# Altium PCB bottle.PcbDoc (part 3 of 3)
Units mil, origin at the board's own origin, x right, y up, seen from the top; angles counter-clockwise.
Board outline 2167.23 x 704.79 mil, 4 copper layers (Top Layer, GND, PWR, Bottom Layer), stack 23.756 mil thick; 195 components, 172 nets, 770 pads, 122 vias.
Unrouted connection lines stored in the file: 308.
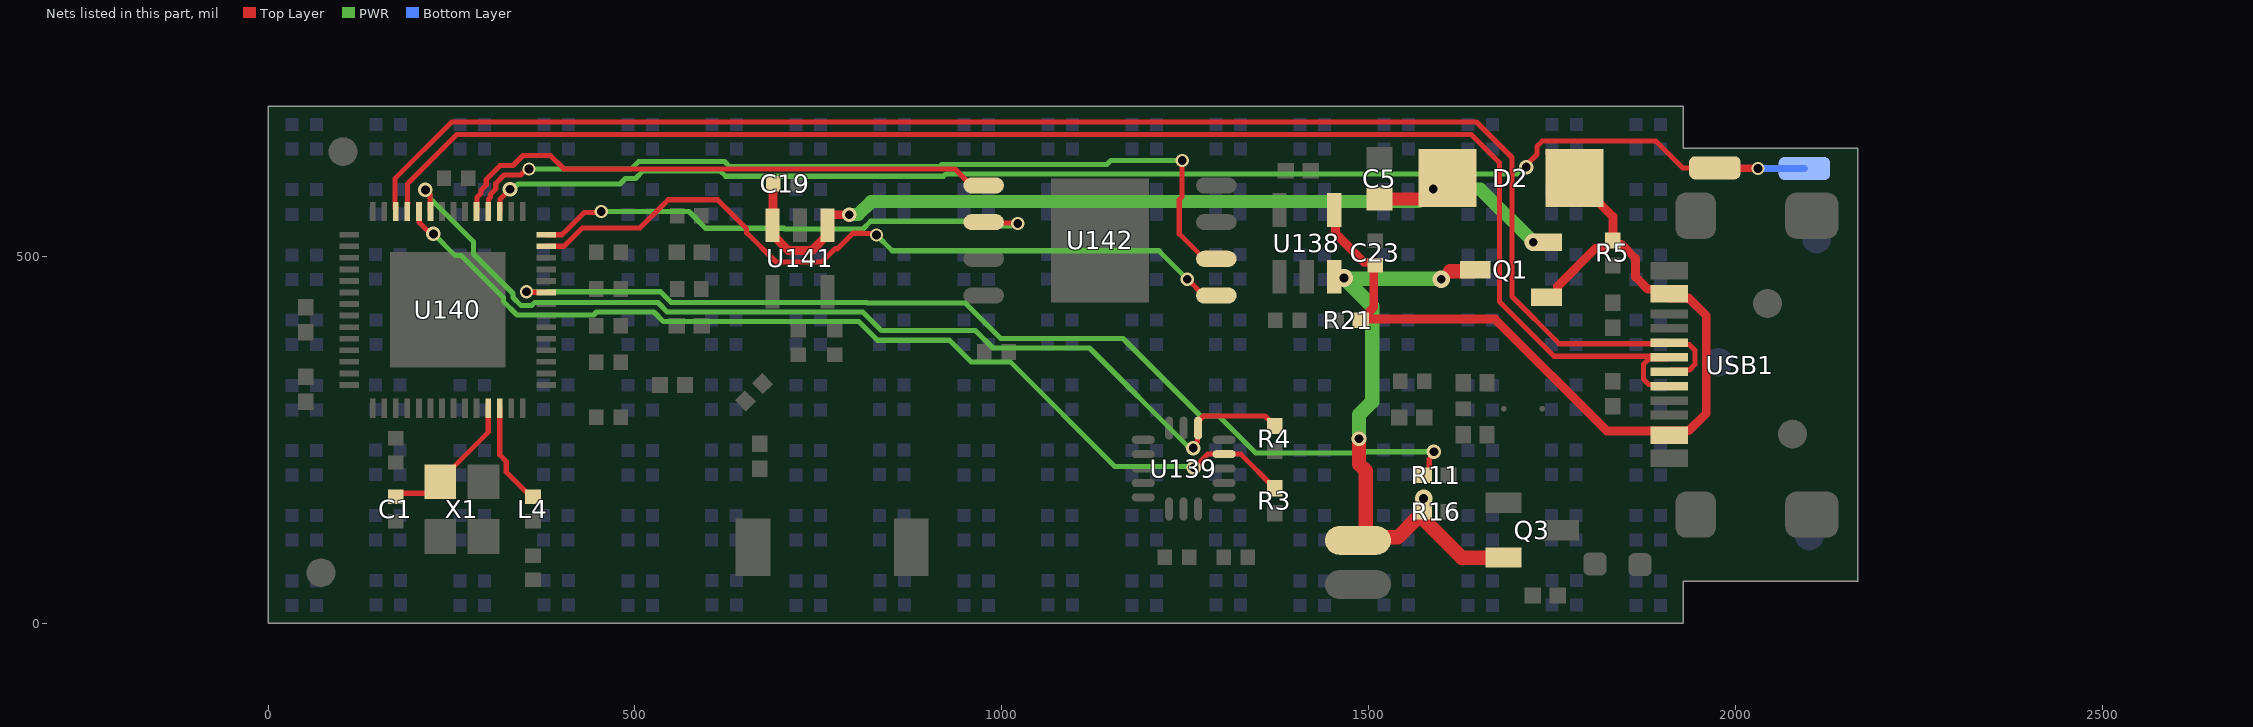
[diagram p5: the nets of this part, all layers, seen from the top]

## Via types
v1: diameter 20, hole 12, Top Layer to Bottom Layer, tented both sides, 96 vias
v2: diameter 18, hole 12, Top Layer to Bottom Layer, tented both sides, 13 vias
v3: diameter 24, hole 12, Top Layer to Bottom Layer, tented both sides, 13 vias

## Nets (pads, with @x,y where several pads share a name; then routed paths per layer and width w, separated by ;. In a path a pad name is that pad's centre, name@x,y a point inside that pad or via, vN(x,y) a via of type N, cw(c..) or ccw(c..) an arc to the next point about the centre after c; other vN are vias at no path point) (continued)
POWER_CONTROL: R11.2 U140.9 | length 1394.3
  Top Layer w7: v2(352.09,452.05) 352.65,451.49 378.53,451.49 U140.9@378.97,451.05 ; R11.2@1575.12,202 1575.63,202 1582.76,209.13 1582.76,224.04 1589.2,230.48 v1(1589.2,234)
  PWR w7: v2(352.09,452.05) 534.96,452.05 549.48,437.53 815.92,437.53 816.62,436.84 950.16,436.84 998.61,388.39 1165.28,388.39 1271.03,282.65 1295.86,282.65 1346.2,232.31 1495.09,232.31 1496.78,234 v1(1589.2,234)
SCL: R3.1 U139.4 U140.24 | length 1353.5
  Top Layer w7: U140.24@205.44,561.59 205.88,561.15 205.88,546.44 218.83,533.49 222.71,533.49 v1(225.2,531) ; v1(1262,212.1) 1280.6,230.7 U139.4@1303.1,230.7 1325.85,230.7 1372,184.55 R3.1@1372,184.04
  PWR w7: v1(225.2,531) 254.89,501.31 263.51,501.31 320.59,444.23 320.59,439 339.04,420.55 443.61,420.55 447.42,424.35 525.89,424.35 538.71,411.53 805.15,411.53 830.66,386.03 928.72,386.03 958.25,356.5 1011.67,356.5 1154.17,214 1260.1,214 v1(1262,212.1)
SDA: R4.1 U139.6 U140.23 | length 1378.4
  Top Layer w7: v1@218.34,587.93 220.75,585.52 220.75,562.03 U140.23@221.19,561.59 ; v1(1261.21,238.88) 1261.21,242.4 1266.93,248.13 1266.93,265.33 U139.6@1267.7,266.1 1267.7,275.27 1275.08,282.65 1358.9,282.65 1372,269.55 R4.1@1372,269.04
  PWR w7: v1@218.34,587.93 220.83,585.44 220.83,579.38 279.84,520.36 279.84,503.36 333.59,449.62 333.59,444.39 344.43,433.55 359.75,433.55 363.55,437.35 531.28,437.35 544.1,424.53 810.54,424.53 836.04,399.03 964.38,399.03 988.02,375.39 1119.61,375.39 v1@1253.63,241.37
  other v1: 214.34,590.93
SPI2_CLK: U140.14 U142.6 | length 721.9
  Top Layer w7: U140.14@378.97,529.79 400.72,529.79 431.29,560.36 453.24,560.36 v2(454.2,561.31) ; U142.6@975.44,547 976.44,546 1021,546 v2(1022,545)
  PWR w7: v2(454.2,561.31) 573.59,561.31 596.31,538.58 703.07,538.58 704.12,537.52 810.87,537.52 821.47,548.12 974.4,548.12 981.02,541.5 1012.4,541.5 1013.79,542.9 1019.9,542.9 v2(1022,545)
SPI2_CS: U140.13 U142.1 | length 1029.5
  Top Layer w7: U140.13@378.97,514.05 403.37,514.05 428.27,538.95 506.65,538.95 538.09,570.38 545.29,577.58 612.47,577.58 652.32,537.73 652.32,532.47 692.17,492.62 754.7,492.62 772.7,510.62 776.13,510.62 797.26,531.74 810.04,531.74 827.03,531.73 v2(829.13,529.62) ; v2(1253,469) 1253.51,469 1275.51,447 U142.1@1292.56,447
  PWR w7: v2(829.13,529.62) 850.76,508 1214,508 v2(1253,469)
SPI2_SDI: U140.18 U142.2 | length 1163.2
  Top Layer w7: U140.18@299.93,561.59 300.37,562.03 300.37,578.33 303.12,581.08 303.12,585.08 310.24,592.2 310.24,599.82 321.66,611.24 344.26,611.24 352.52,619.5 v2(355.5,619.5) ; v2(1246,631) 1246,581.52 1242,577.52 1242,531.02 1276.02,497 U142.2@1292.56,497
  PWR w7: v2(355.5,619.5) 495.28,619.5 505.25,629.47 622.16,629.47 629.13,622.5 915.28,622.5 918.28,625.5 1143.28,625.5 1148.78,631 v2(1246,631)
SPI2_SDO: U140.19 U142.5 | length 757.9
  Top Layer w7: U140.19@284.18,561.59 284.62,562.03 284.62,580.96 290.12,586.46 290.12,590.46 297.24,597.59 297.24,605.2 316.28,624.24 333.64,624.24 347.4,638 384.63,638 403.13,619.5 631.7,619.5 631.81,619.6 936.3,619.6 958.9,597 U142.5@975.44,597
TOUCH: pad.3 U140.17 | length 1856.9
  Top Layer w7: U140.17@315.68,561.59 316.12,562.03 316.12,578.12 v1(329.74,591.74) ; v1(1715.2,622) 1715.2,624.71 1729.83,639.33 1729.83,650.3 1736.9,657.37 1891.83,657.37 1928.2,621 pad.3@1972.2,621
  Top Layer w10: pad.3@1972.2,621 1972.7,620.5 2030.7,620.5 v2(2031.2,620)
  PWR w7: v1(329.74,591.74) 333.26,591.74 340.52,599 479.72,599 487.22,606.5 500.67,606.5 510.64,616.47 616.77,616.47 623.74,609.5 920.67,609.5 923.67,612.5 1702.19,612.5 1711.69,622 v1(1715.2,622)
  Bottom Layer w10: v2(2031.2,620) pad.3@2094.2,620
UD_N: U140.25 USB1.A7 USB1.B7 | length 2118.7
  Top Layer w7: U140.25@189.69,564 190.13,564.44 190.13,572.46 190.51,572.84 189.69,573.67 189.69,599.04 257.16,666.52 1640.25,666.52 1678.7,628.07 1678.7,438.38 1752.98,364.11 1908.46,364.11 USB1.A7@1909.8,362.76 1907.4,360.35 1882.15,360.35 1874.71,352.92 1874.71,333.24 1882.16,325.8 1907.4,325.8 USB1.B7@1909.8,323.39
UD_P: U140.26 USB1.A6 USB1.B6 | length 2144.6
  Top Layer w7: U140.26@173.51,564.82 173.51,565.8 172.69,566.63 172.69,606.09 250.12,683.52 1647.29,683.52 1695.7,635.11 1695.7,445.42 1760.02,381.11 1911.15,381.11 1912.21,380.04 1937.45,380.04 1944.9,372.6 1944.9,352.92 1937.46,345.49 1912.21,345.49 USB1.A6@1909.8,343.08
VBAT: pad.2@1485.65,113.15 Q1.3 Q3.2 R16.1 U138.3 | length 795
  Top Layer w19.68: v1(1487.01,251.81) 1487.07,251.75 1487.07,217.21 1496.2,208.07 1496.2,126.24 1487.11,117.15 1496.2,117.15 1539.77,117.15 1569.83,147.21 1574.62,152 R16.1@1575.12,152 1575.63,152 1576.42,151.21 1576.42,140.62 1627.44,89.6 Q3.2@1683.84,89.6 ; 1611.17,480.03 1643.61,480.03 Q1.3@1645.58,482
  PWR w19.68: v3(1466.81,470.76) v3@1467.57,470 ; v1(1487.01,251.81) 1487.07,251.87 1487.07,284.24 1505.2,302.37 1505.2,432.36 v3@1467.57,470 ; v3(1599.2,469.22) 1598.42,470 v3@1467.57,470
  other v3: 1575.2,170.17
VBUS: C23.2 D2.1 Q1.1 R5.2 R21.2 U138.4 USB1.A4 USB1.A9 USB1.B4 USB1.B9 | length 1275.9
  Top Layer w12: U138.4@1453.29,563.42 1455.15,561.56 1455.15,531.05 1493.9,492.3 1504.57,492.3 1507.2,489.67 1507.2,431 1494.38,418.18 1494.38,417.67 1489.75,413.04 R21.2@1489.24,413.04 ; R21.2@1491.89,415 1672.32,415 1824.95,262.37 USB1.B9@1909.8,262.37 1909.9,262.46 1936.72,262.46 1960.39,286.14 1960.39,419.7 1936.72,443.38 1909.9,443.38 USB1.B4@1909.8,443.47 ; Q1.1@1742.83,444.6 1752.08,444.6 1757.89,450.41 1757.89,459.66 1809.33,511.09 1822.76,511.09 1833.2,521.53 R5.2@1833.2,522.04 1833.2,554.62 D2.1@1780.82,607 ; R5.2@1834.15,522.04 1834.15,520.59 1837.83,516.91 1844.45,516.91 1864.02,497.33 1864.02,472.28 1880.93,455.37 1909.71,455.37 USB1.A9@1909.8,455.28
VSYS: C5.1 C19.2 D2.2 Q1.2 U141.1 U141.3 | length 1303
  Top Layer w12: C19.2@688.61,603.47 688.18,603.04 688.18,543.32 U141.3@687.75,542.89 687.75,529.76 709.4,508.12 740.91,508.12 762.55,529.76 762.55,553.38 766.2,557.02 v1(792.23,557.02)
  Top Layer w18: C5.1@1515.2,578.44 1579.03,578.44 D2.2@1607.59,607
  PWR w18: v1(792.23,557.02) 792.61,557.41 804.59,557.41 822.19,575 1569.04,575 1585.67,591.63 1587.83,591.63 v1(1588.21,592.01) 1652.7,592.01 1724.76,519.95 v3(1724.76,519.68)
XTAL_N: C1.2 U140.53 X1.3 | length 194.2
  Top Layer w7: C1.2@173.97,177.36 218.58,177.36 X1.3@234.44,193.22 234.44,195.19 299.93,260.68 U140.53@299.93,293.28
XTAL_P: L4.1 U140.54 | length 141.2
  Top Layer w7: U140.54@315.68,293.28 315.68,229.75 324.64,220.78 324.64,206.43 353.18,177.89 L4.1@363.44,177.89
pads on no net: AE1.2 FD1.1 FD2.1 FD3.1 FD4.1 FD5.1 FD6.1 FD7.1 U8.1 U139.2 U139.3 U139.9 U140.6 U140.7 U140.8 U140.10 U140.21 U140.22 U140.27 U140.28 U140.29 U140.30 U140.31 U140.32 U140.33 U140.34 U140.35 U140.37 U140.38 U140.39 U140.40 U140.41 U140.42 U140.43 U140.44 U140.45 U140.47 U140.48 U140.49 U140.50 U140.51 U140.52 U141.4 U142.9 USB1.A8 USB1.B8

## Polygon pours and split planes (outlines as drawn)
GND on PWR "GND_L03_P000" (solid, remove dead copper, pour order 0): -126.8,754 2625.2,754 2625.2,-40 2622.2,-43 -126.8,-43
GND on Bottom Layer "GND_L04_P001" (solid, remove dead copper, pour order 1): -239.8,754 2625.2,754 2625.2,-40 2622.2,-43 -239.8,-43
GND on GND "GND_L02_P002" (solid, remove dead copper, pour order 2): -169.8,754 2633.2,754 2633.2,-40 2630.2,-43 -169.8,-43
GND on Top Layer "GND_L01_P003" (solid, remove dead copper, pour order 3): -213.8,750 2625.2,750 2625.2,-44 2622.2,-47 -213.8,-47

## Other copper
Top Layer:
  rectangle net UD_N: 1775.72,355.62 1794.72,369.62
  rectangle net UD_P: 1775,375.68 1794,389.68
Multi-Layer:
  pour cut-out: 208.5,280.19 326.02,280.19 386.86,219.34 386.86,41.71 158.43,41.71 146.28,53.86 146.28,217.97
  pour cut-out: 1921.2,668 2177.2,668 2177.2,598 1921.2,598
  pour cut-out: 1084.2,-43 474.2,-43 474.2,275 1084.2,275

## Silkscreen, mask and mechanical layers (free items; w line width, h text height)
Top Overlay:
  text "+" at 1496.74,141.92 h60
  text "-" at 1499.2,-5.99 h60
Mechanical 1:
  the board outline again, w10
Drill Drawing:
  text ".Legend" at -702.8,1041.99 h60